# Altium PCB User-Controller.PcbDoc
Units mm, origin at the board's own origin, x right, y up, seen from the top; angles counter-clockwise.
Board outline 60 x 28 mm, 2 copper layers (Top Layer, Bottom Layer); 21 components, 11 nets, 68 pads, 141 vias.
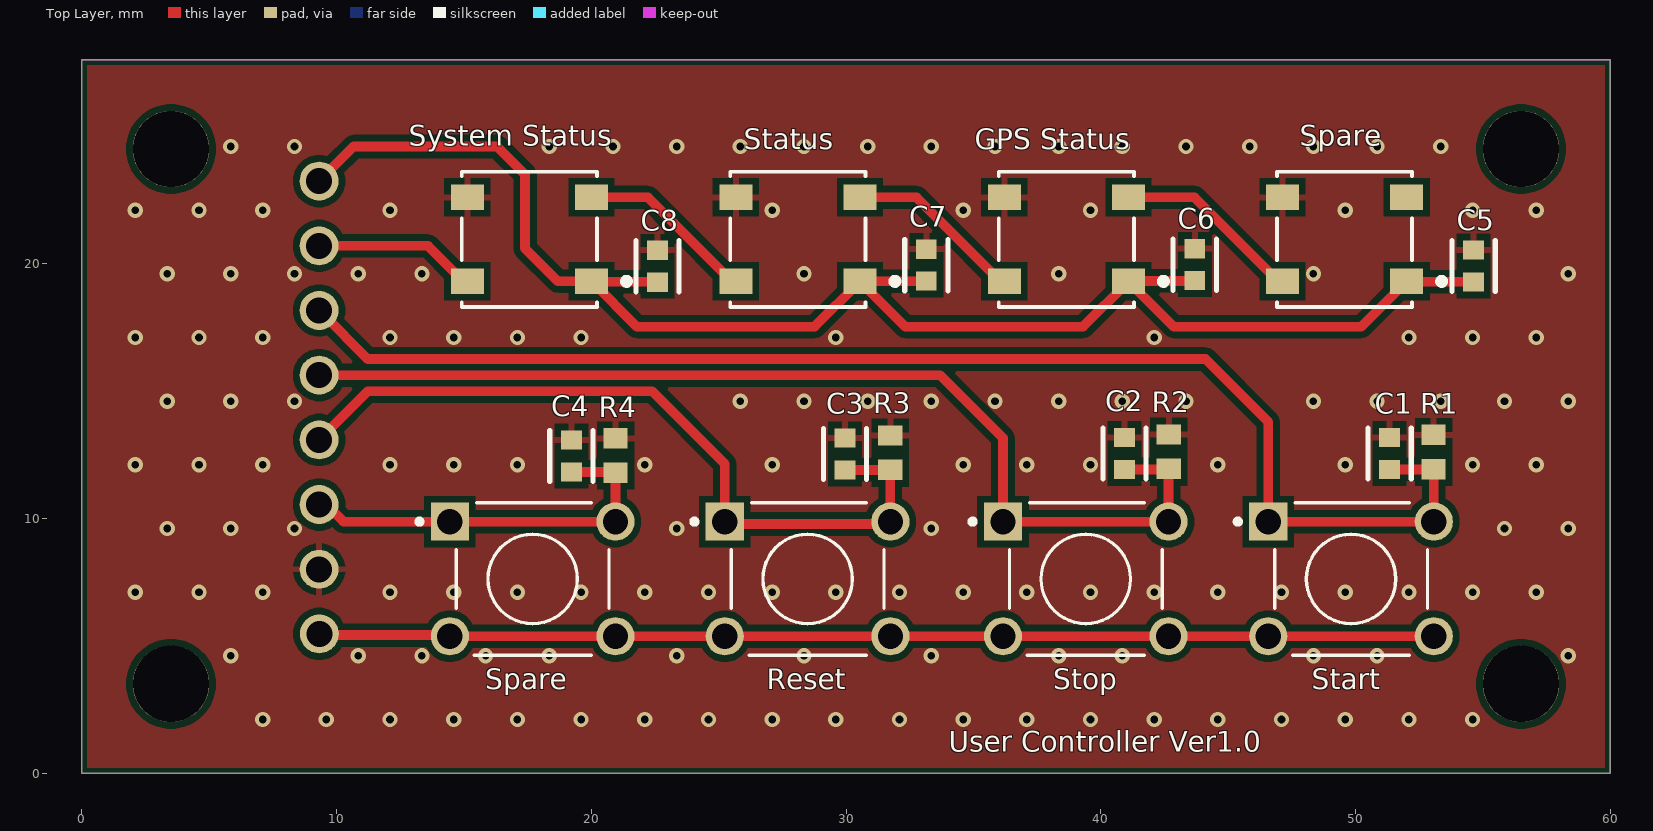
[diagram p0: Top Layer view]
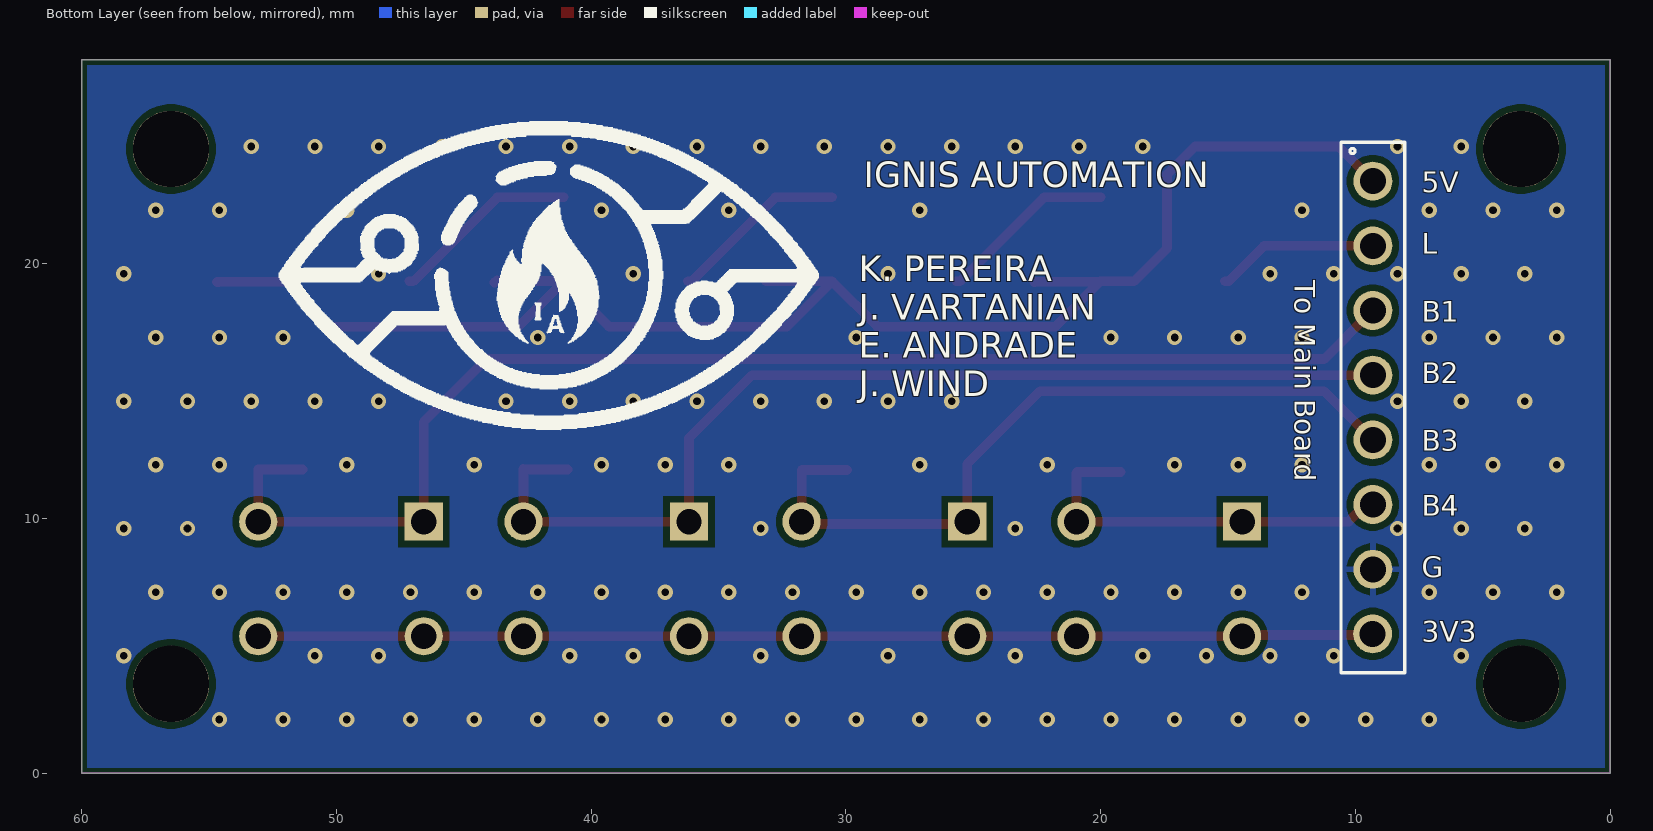
[diagram p1: Bottom Layer view, seen from below]
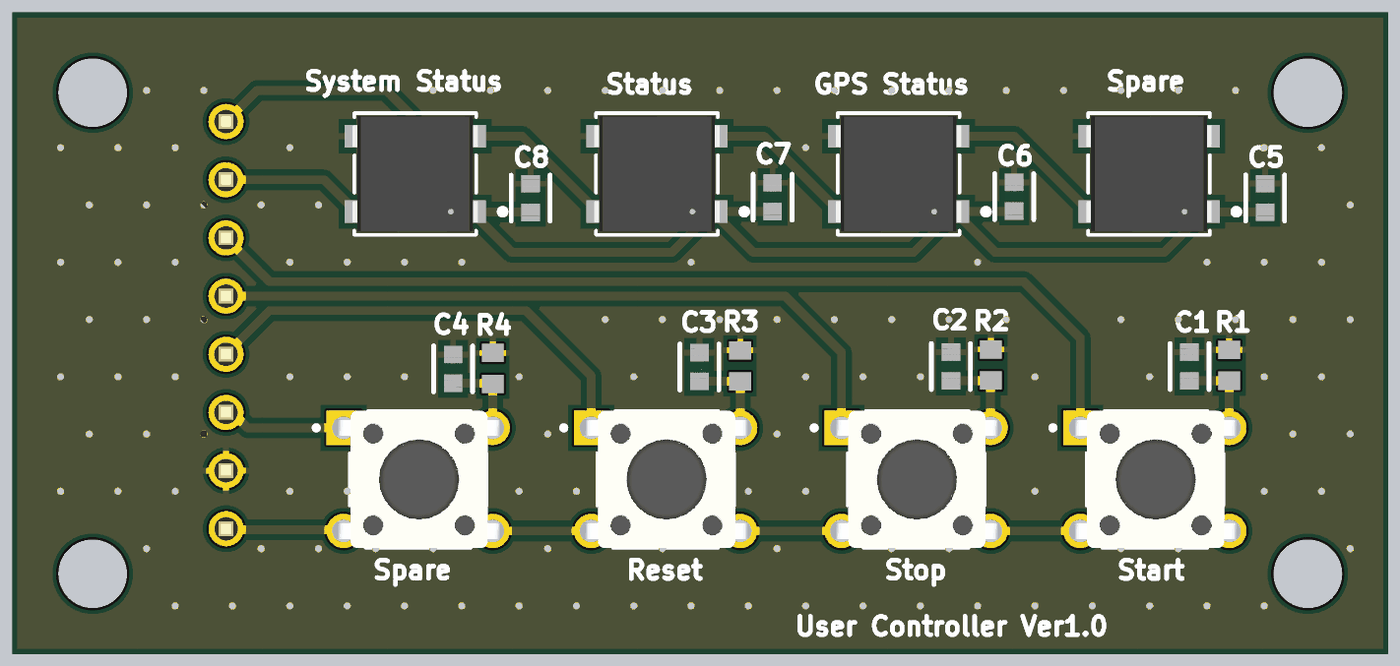
[diagram p2: 3D render of the assembled board from above, using the file's embedded part models]

## Layer stack, top to bottom
Top Solder: solder mask 0.0102, Solder Resist, Dk 3.5
Top Layer: signal copper 0.0356
Dielectric 1: dielectric 0.32, FR-4, Dk 4.8
Bottom Layer: signal copper 0.0356
Bottom Solder: solder mask 0.0102, Solder Resist, Dk 3.5

## Board outline
0,0 0,28 60,28 60,0

## Design rules (kind name [scope] priority, off if disabled: settings)
Clearance Clearance_1 [InNamedPolygon('NONET_L-01_P-001') Or InNamedPolygon('NONET_L-01_P-001') vs OnLayer('Keep-Out Layer')] p1: gap=0.2 ignorepadtopadclearanceinfootprint=FALSE
Clearance [All] p2: gap=0.254 ignorepadtopadclearanceinfootprint=FALSE except(0: Arc-Hole Track-Hole SMDPad-Hole THPad-Hole Via-Hole Fill-Hole Poly-Hole Region-Hole Text-Hole)
HoleSize Via [IsVia] p1: absolutevalues=TRUE maxlimit=6.3 minlimit=0.3 maxpercent=80.000 minpercent=20.000
HoleSize [All] p2: absolutevalues=TRUE maxlimit=6.3 minlimit=0.2 maxpercent=80.000 minpercent=20.000
HoleToHoleClearance [All] p1: gap=0.5 allowstackedmicrovias=TRUE
MinimumAnnularRing [All] p1: minimumring=0.13
MinimumSolderMaskSliver [All] p1: minsoldermaskwidth=0.2
PolygonConnect [All] p1: connectstyle=Relief reliefconductorwidth=0.254 reliefentries=4 polygonreliefangle="90 Angle" airgapwidth=0.254
RoutingVias [All] p1: holewidth=0.711 width=1.27 viastyle="Through Hole" minholewidth=0.711 minwidth=1.27 maxholewidth=0.711 maxwidth=1.27
SilkToSolderMaskClearance [IsPad] p1: minsilkscreentomaskgap=0.15 clearancetoexposedcopper=TRUE
SolderMaskExpansion [All] p1: expansion=0.102 istentingtop=FALSE
Width [All] p1: maxlimit=1.016 minlimit=0.254 preferedwidth=0.381
26 further rules are at their usual default settings.

## Components (designator, comment, footprint, x,y, rotation, side; value= is the part's Value field where it differs from the comment)
C1 "0.1uF" FP-CL10-IPC_C 51.34,12.548 r270 top
C2 "0.1uF" FP-CL10-IPC_C 40.932,12.548 r270 top
C3 "0.1uF" FP-CL10-IPC_C 29.962,12.527 r270 top
C4 "0.1uF" FP-CL10-IPC_C 19.221,12.446 r270 top
C5 "100nf" FP-CL10-IPC_C 54.638,19.905 r90 top
C6 "100nf" FP-CL10-IPC_C 43.694,19.963 r90 top
C7 "100nf" FP-CL10-IPC_C 33.155,19.942 r90 top
C8 "100nf" FP-CL10-IPC_C 22.6,19.9 r90 top
"GPS Status" "GPS Status" WS2812B_WDS 38.652,20.955 r180 top (schematic designator U3)
R1 "10k" RESC1608X55X30NL15T15 53.069,12.602 r270 top
R2 "10k" RESC1608X55X30NL15T15 42.672,12.615 r270 top
R3 "10k" RESC1608X55X30NL15T15 31.738,12.577 r270 top
R4 "10k" RESC1608X55X30NL15T15 20.954,12.466 r270 top
Reset "Reset SW" SW_1825910-6-4 28.492,7.62 r0 top (schematic designator SW3)
Spare "Spare LED" WS2812B_WDS 49.574,20.955 r180 top (schematic designator U4)
Spare "Spare SW" SW_1825910-6-4 17.697,7.62 r0 top (schematic designator SW4)
Start "Start SW" SW_1825910-6-4 49.828,7.62 r0 top (schematic designator SW1)
Status "Status LED" WS2812B_WDS 28.111,20.955 r180 top (schematic designator U2)
Stop "Stop SW" SW_1825910-6-4 39.414,7.62 r0 top (schematic designator SW2)
"System Status" "System Status LED" WS2812B_WDS 17.57,20.955 r180 top (schematic designator U1)
"To Main Board" "To Main Board" 61300711821 9.315,15.621 r270 bottom (schematic designator J1)

## Footprints (in the part's own frame and the unit in brackets; to place one, negate y for a bottom-side part, rotate by r counter-clockwise, add the part's x,y. Pads: shape width x height; smd on the part's side, far side on the other; paste and mask are expansions set on the pad)
61300711821 [mm]
  round 1.53 hole 1.02: 1(-7.62,0) 2(-5.08,0) 3(-2.54,0) 4(0,0) 5(2.54,0) 6(5.08,0) 7(7.62,0) 8(10.155,-0.008)
  silkscreen extent -9.14,-1.25 11.68,1.25, body extent -8.9,-1.25 11.43,1.25, height 10.54
FP-CL10-IPC_C [mm]
  rect 0.758x0.812 smd paste+0 mask+0: 1(-0.627,0) 2(0.627,0)
  silkscreen extent -1.01,-0.85 1.01,0.85, body extent -1.11,-0.55 1.11,0.55, height 0.25
RESC1608X55X30NL15T15 [mm] "Chip Resistor, 2-Leads, Body 1.60x0.80mm, IPC Medium Density"
  rect 0.8x0.95 smd: 1(-0.675,0) 2(0.675,0)
  body extent -0.87,-0.48 0.87,0.48, height 0.55
SW_1825910-6-4 [mm]
  rect 1.498x1.498 hole 0.99: 1(-3.25,2.25)
  round 1.498 hole 0.99: 2(3.25,2.25) 3(-3.25,-2.25) 4(3.25,-2.25)
  silkscreen extent -4.54,-3 3,3, body extent -3.86,-3 3.94,3, height 5.01
WS2812B_WDS [mm]
  rect 1.29x0.99 smd paste+0 mask+0: 1(-2.436,1.65) 2(-2.436,-1.65) 3(2.436,-1.65) 4(2.436,1.65)
  silkscreen extent -3.94,-2.65 2.65,2.65, body extent -2.73,-2.53 2.73,2.53, height 1.63

## Part data
C1 C2 C3 C4 C5 C6 C7 C8: library part CMP-13271-003248-1, "Cap Ceramic 10uF 10V X5R ±20% Pad SMD 0603 +85°C T/R", Capacitance=10uF, Case Code (Imperial)=0603, Case Code (Metric)=1608, Dielectric=X5R, Max Operating Temperature=85°C, Min Operating Temperature=-55°C, Package Quantity=1, Tolerance=20%, Voltage Rating=10V, Case/Package=0603, Contact Plating=Tin, Depth=0.8mm, Height=0.8mm, Lead Free="Lead Free", Length=1.6mm, Mount="Surface Mount", Packaging="Tape and Reel", Radiation Hardening=No, Thickness=0.035inch, Voltage Rating (DC)=10V, Width=0.031inch
"GPS Status" Spare Status "System Status": library part WS2812B, "WS2812B"
R1 R2 R3 R4: library part CMP-2000-00180-1, Manufacturer=Panasonic, Part Number=ERJ-3EKF1001V
Reset Spare Start Stop: library part 1825910-6, "Tactile Switch"
"To Main Board": library part 61300711821, "Single Row / Straight / Without Shroud Female header Female 7", Package=None, Availability=Unavailable, Check_prices=https://www.snapeda.com/parts/61300711821/W%C3%BCrth%20Elektronik/view-part/2704590/?ref=eda, MF="WÃ¼rth Elektronik", MP=61300711821, Price=None, SnapEDA_Link=https://www.snapeda.com/parts/61300711821/W%C3%BCrth%20Elektronik/view-part/2704590/?ref=snap

## Free pads (board coordinates)
  round 3 hole 3 unplated: ""(3.5,3.5) ""(3.5,24.5) ""(56.5,3.5) ""(56.5,24.5)

## Via types
v1: diameter 0.6, hole 0.3, Top Layer to Bottom Layer, tented both sides, 141 vias

## Nets (pads, with @x,y where several pads share a name; then routed paths per layer and width w, separated by ;. In a path a pad name is that pad's centre, name@x,y a point inside that pad or via, vN(x,y) a via of type N, cw(c..) or ccw(c..) an arc to the next point about the centre after c; other vN are vias at no path point)
3V3: "To Main Board.8" Reset.3 Reset.4 Spare.3@14.447,5.37 Spare.4@20.947,5.37 Start.3 Start.4 Stop.3 Stop.4 | length 43.8
  Top Layer w0.381: 9.323,5.466 9.371,5.418 14.399,5.418 14.447,5.37 20.947,5.37 Reset.3 Reset.4 Stop.3 Stop.4 Start.3 Start.4
5V: "GPS Status.1" "System Status.1" "To Main Board.1" C5.1 C6.1 C7.1 C8.1 Spare.1@52.01,19.305 Status.1 | length 62.1
  Top Layer w0.381: 9.315,23.241 10.674,24.6 16.3,24.6 17.4,23.5 17.4,20.6 18.695,19.305 20.006,19.305 20.022,19.289 ; C8.1 22.584,19.289 20.022,19.289 ; C7.1 33.15,19.31 30.551,19.31 Status.1 ; C6.1 43.679,19.32 41.103,19.32 41.088,19.305 ; C6.1@43.777,19.283 C6.1@43.799,19.262 ; C5.1 54.625,19.292 52.023,19.292 52.01,19.305 50.231,17.526 42.867,17.526 41.088,19.305 ; C5.1@54.681,19.291 C5.1@54.695,19.276 ; 20.022,19.289 21.785,17.526 28.768,17.526 Status.1 ; Status.1 32.326,17.526 39.309,17.526 41.088,19.305
BTN1: "To Main Board.3" C1.2 R1.2 Start.1 Start.2 | length 53.5
  Top Layer w0.381: 9.315,18.161 9.442,18.288 9.442,18.034 11.22,16.256 44.113,16.256 46.578,13.791 Start.1 Start.2 53.078,11.917 R1.2 53.062,11.921 C1.2
BTN2: "To Main Board.4" C2.2 R2.2 Stop.1 Stop.2 | length 41.5
  Top Layer w0.381: 9.315,15.621 33.699,15.621 36.164,13.156 Stop.1 Stop.2 R2.2@42.664,11.932 ; C2.2 42.653,11.921 R2.2@42.664,11.932 ; R2.2 R2.2@42.664,11.932
BTN3: "To Main Board.5" C3.2 R3.2 Reset.1 Reset.2 | length 30.5
  Top Layer w0.381: 9.315,13.081 11.22,14.986 22.396,14.986 25.242,12.14 Reset.1 25.333,9.779 31.651,9.779 Reset.2 31.742,11.894 31.736,11.9 C3.2
BTN4: "To Main Board.6" C4.2 R4.2 Spare.1@14.447,9.87 Spare.2@20.947,9.87 | length 15.6
  Top Layer w0.381: 9.315,10.541 9.594,10.541 10.265,9.87 14.447,9.87 20.947,9.87 20.947,11.784 R4.2 20.926,11.819 C4.2
GND: "GPS Status.3" "System Status.3" "To Main Board.7" C1.1 C2.1 C3.1 C4.1 C5.2 C6.2 C7.2 C8.2 R1.1 R2.1 R3.1 R4.1 Spare.3@47.138,22.605 Status.3
  other v1: 7.1,2.1 9.6,2.1 12.1,2.1 14.6,2.1 17.1,2.1 19.6,2.1 22.1,2.1 24.6,2.1 27.1,2.1 29.6,2.1 32.1,2.1 34.6,2.1 37.1,2.1 39.6,2.1 42.1,2.1 44.6,2.1 47.1,2.1 49.6,2.1 52.1,2.1 54.6,2.1 5.85,4.6 10.85,4.6 13.35,4.6 15.85,4.6 18.35,4.6 23.35,4.6 28.35,4.6 33.35,4.6 38.35,4.6 40.85,4.6 48.35,4.6 50.85,4.6 58.35,4.6 2.1,7.1 4.6,7.1 7.1,7.1 12.1,7.1 14.6,7.1 17.1,7.1 19.6,7.1 22.1,7.1 24.6,7.1 27.1,7.1 29.6,7.1 32.1,7.1 34.6,7.1 37.1,7.1 39.6,7.1 42.1,7.1 44.6,7.1 47.1,7.1 49.6,7.1 52.1,7.1 54.6,7.1 57.1,7.1 3.35,9.6 5.85,9.6 8.35,9.6 23.35,9.6 33.35,9.6 55.85,9.6 58.35,9.6 2.1,12.1 4.6,12.1 7.1,12.1 12.1,12.1 14.6,12.1 17.1,12.1 22.1,12.1 27.1,12.1 34.6,12.1 37.1,12.1 39.6,12.1 44.6,12.1 49.6,12.1 54.6,12.1 57.1,12.1 3.35,14.6 5.85,14.6 8.35,14.6 25.85,14.6 28.35,14.6 30.85,14.6 33.35,14.6 35.85,14.6 38.35,14.6 40.85,14.6 43.35,14.6 48.35,14.6 50.85,14.6 53.35,14.6 55.85,14.6 58.35,14.6 2.1,17.1 4.6,17.1 7.1,17.1 12.1,17.1 14.6,17.1 17.1,17.1 19.6,17.1 29.6,17.1 42.1,17.1 52.1,17.1 54.6,17.1 57.1,17.1 3.35,19.6 5.85,19.6 8.35,19.6 10.85,19.6 13.35,19.6 28.35,19.6 38.35,19.6 48.35,19.6 58.35,19.6 2.1,22.1 4.6,22.1 7.1,22.1 12.1,22.1 27.1,22.1 34.6,22.1 39.6,22.1 49.6,22.1 54.6,22.1 57.1,22.1 5.85,24.6 8.35,24.6 18.35,24.6 20.85,24.6 23.35,24.6 25.85,24.6 28.35,24.6 30.85,24.6 33.35,24.6 35.85,24.6 38.35,24.6 40.85,24.6 43.35,24.6 45.85,24.6 48.35,24.6 50.85,24.6 53.35,24.6
LED: "System Status.4" "To Main Board.2" | length 6.4
  Top Layer w0.381: 9.315,20.701 13.588,20.701 14.984,19.305 15.134,19.305
NetU1_2: "System Status.2" Status.4 | length 7
  Top Layer w0.381: 20.006,22.605 22.225,22.605 25.525,19.305 Status.4
NetU2_2: "GPS Status.4" Status.2 | length 7
  Top Layer w0.381: Status.2 32.766,22.605 36.066,19.305 36.216,19.305
NetU3_2: "GPS Status.2" Spare.4@47.138,19.305 | length 7.4
  Top Layer w0.381: 41.088,22.605 41.191,22.605 41.192,22.606 43.687,22.606 46.988,19.305 Spare.4@47.138,19.305
pads on no net: Spare.2@52.01,22.605

## Polygon pours and split planes (outlines as drawn)
GND on Bottom Layer "NONET_L-01_P-001" (solid, pour order 1): 0,0 -0.001,28 60,28.002 60,-0.001
GND on Top Layer "NONET_L-01_P-001" (solid, pour order 0): 0,0 0,28 60,28 60,0

## Keep-outs
Keep-Out Layer:
  the board outline again, w0.025

## Silkscreen, mask and mechanical layers (free items; w line width, h text height)
Top Overlay:
  text "User Controller Ver1.0" at 34.026,0.835 h0.8
Bottom Overlay:
  drawing of 6 lines, arcs and shapes, not listed
  text "IGNIS AUTOMATION" at 29.3,23 h1
  text "5V" at 7.4,22.806 h0.8
  text "L" at 7.4,20.393 h0.8
  text "B1" at 7.4,17.726 h0.8
  text "B2" at 7.4,15.313 h0.8
  text "K. PEREIRA / J. VARTANIAN / E. ANDRADE / J. WIND" at 29.5,14.8 h1
  text "B3" at 7.4,12.646 h0.8
  text "B4" at 7.4,10.106 h0.8
  text "G" at 7.4,7.693 h0.8
  text "3V3" at 7.4,5.153 h0.8
Mechanical 1:
  the board outline again, w0.025